# EAGLE board RadTherm (EAGLE 7.1.0)
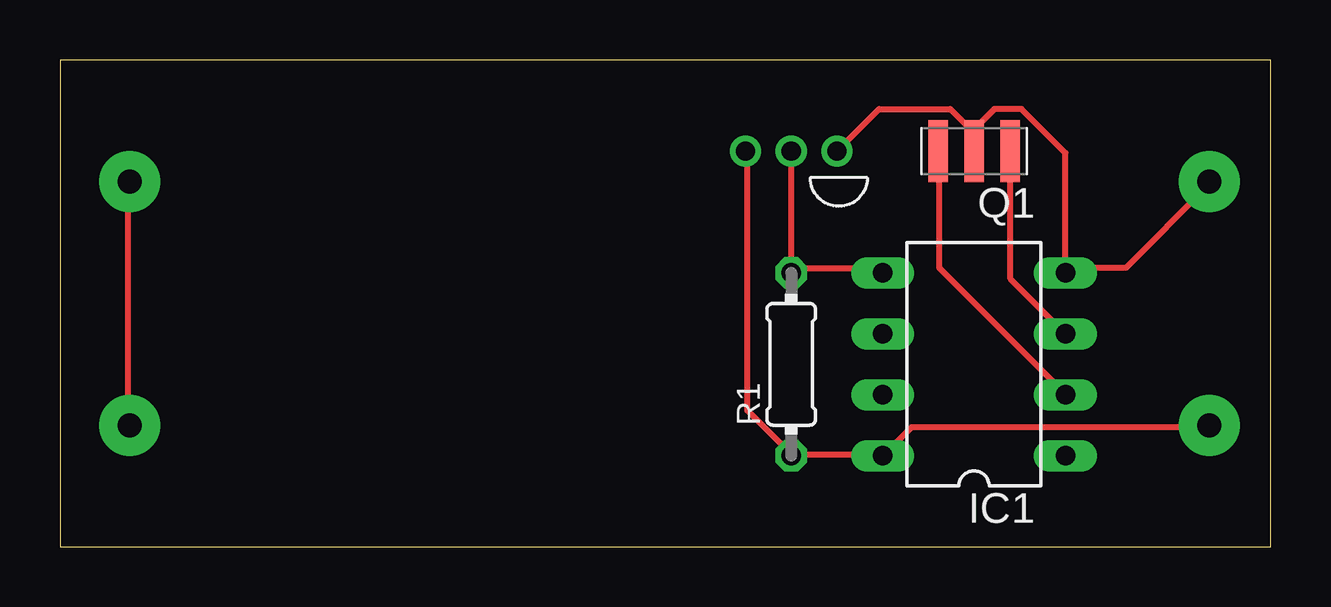
[diagram p0: board, top side]
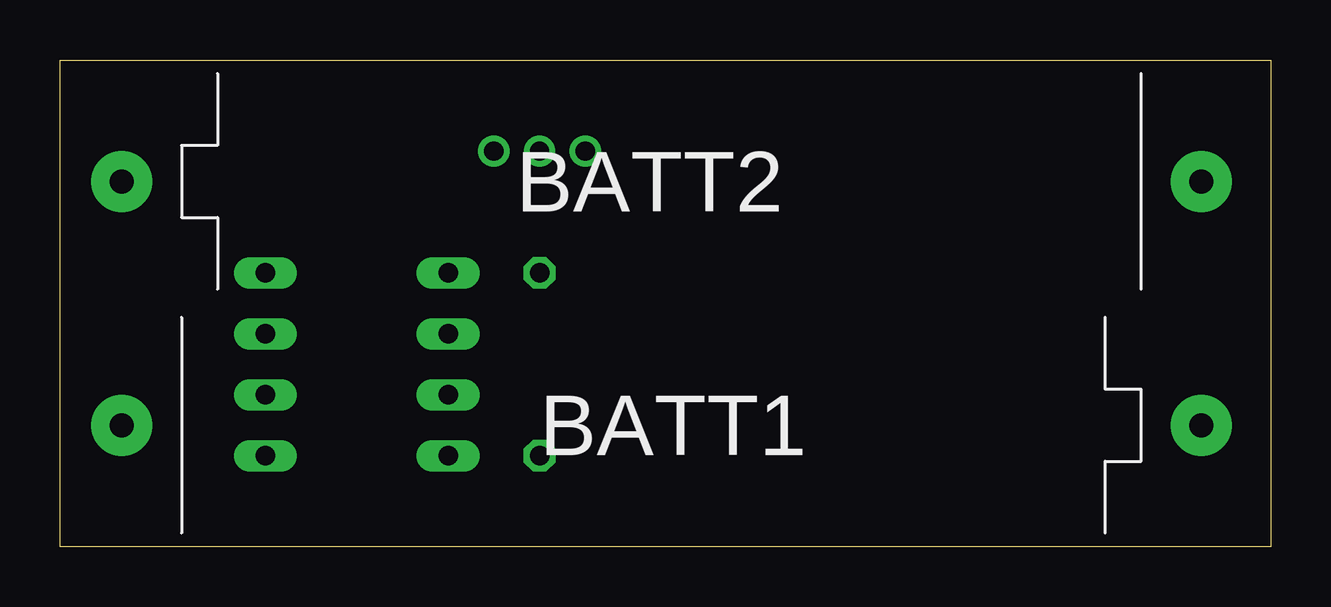
[diagram p1: board, bottom side, seen from below]

Size 50.47 x 20.31 mm. Coordinates in mm from the lower left corner, seen from the top.
Outline: 0,0 50.47,0 50.47,20.31 0,20.31 0,0
Copper layers (1*16): Top 0.035mm / dielectric 1.5mm / Bottom 0.035mm
Design rules "default": minimum track width 10mil, minimum drill 24mil, track to track 8mil, track to pad 8mil, pad to pad 8mil, via to via 8mil, smd to smd 8mil, copper to edge 40mil, drill to drill 8mil, minimum pad ring 10mil, minimum via ring 8mil, stop-mask expansion 4mil, vias tented up to drill 0mil, thermal gap 10mil

## Footprints (pad centres in the part's own frame; a part is rotated, then mirrored left to right if it is on the bottom)
12BH412 = drill 1 pad 2.54: + 22.5,0; - -22.5,0
DIL08 = drill 0.813 long: 1 -3.81,-3.81; 2 -1.27,-3.81; 3 1.27,-3.81; 4 3.81,-3.81; 5 3.81,3.81; 6 1.27,3.81; 7 -1.27,3.81; 8 -3.81,3.81
CSTCR6M = smd 0.8 x 2.6: 1 -1.5,0; 2 0,0; 3 1.5,0
0204/7 = drill 0.813 octagon: 1 -3.81,0; 2 3.81,0
DS1820 = drill 0.8: DQ 2.54,-1.27; GND 0.635,-1.27; VDD 4.445,-1.27

## Placement (x,y rotation side)
BATT1  AAA  [12BH412]  25.4,5.08 0 bottom
BATT2  AAA  [12BH412]  25.4,15.24 180 bottom
IC1  TINY10P  [DIL08]  38.1,7.62 90 top
Q1  CSTCR6M00G53Z  [CSTCR6M]  38.1,16.51 180 top
R1  4k7  [0204/7]  30.48,7.62 90 top
U$1  DS1820TO92  [DS1820]  33.02,15.24 180 top

## Library data of the parts
BATT1 BATT2 = adafruit
IC1 = atmel; OC_FARNELL: unknown; OC_NEWARK: unknown
Q1 = murata-filter; MPN: CSTCR6M00G53-R0; OC_FARNELL: 1170434; OC_NEWARK: 25M8759
R1 = rcl
U$1 = Ava

## Nets
GND: BATT2.+ IC1.4 Q1.2 U$1.GND
N$1: BATT1.+ BATT2.-
N$2: IC1.3 Q1.1
N$3: IC1.2 Q1.3
N$5: IC1.5 R1.2 U$1.DQ
N$6: IC1.6
N$7: BATT1.- IC1.8 R1.1 U$1.VDD

## Tracks (layer width: path | path; a pad name or v marks a point on that pad's centre or on a via)
GND
  Top 0.254: 38.02,17.35 38.02,16.66 Q1.2 38.02,17.35 | 38.02,17.35 37.11,18.26 34.14,18.26 U$1.GND | 41.91,11.63 44.42,11.63 47.85,15.06 BATT2.+ | 38.02,17.35 38.94,18.26 40.08,18.26 41.91,16.43 41.91,11.63 | 41.91,11.63 IC1.4
N$1
  Top 0.254: BATT1.+ 2.82,5.23 2.82,15.06 BATT2.-
N$2
  Top 0.254: IC1.3 39.62,11.18 39.62,16.43 Q1.1
N$3
  Top 0.254: Q1.3 36.65,16.43 36.65,11.63 41.91,6.38 IC1.2
N$5
  Top 0.254: 30.48,11.63 U$1.DQ | 30.48,11.63 34.14,11.63 IC1.5 | 30.48,11.63 R1.2
N$7
  Top 0.254: 30.48,3.86 28.65,5.69 28.65,16.43 U$1.VDD | 30.48,3.86 34.14,3.86 IC1.8 34.37,3.86 35.51,5 47.85,5 BATT1.- | 30.48,3.86 R1.1